# Altium PCB HomeController.PcbDoc (part 1 of 2)
Units mm, origin at the board's own origin, x right, y up, seen from the top; angles counter-clockwise.
Board outline 157.86 x 101.98 mm, 2 copper layers (Top Layer, Bottom Layer); 48 components, 58 nets, 214 pads, 16 vias.
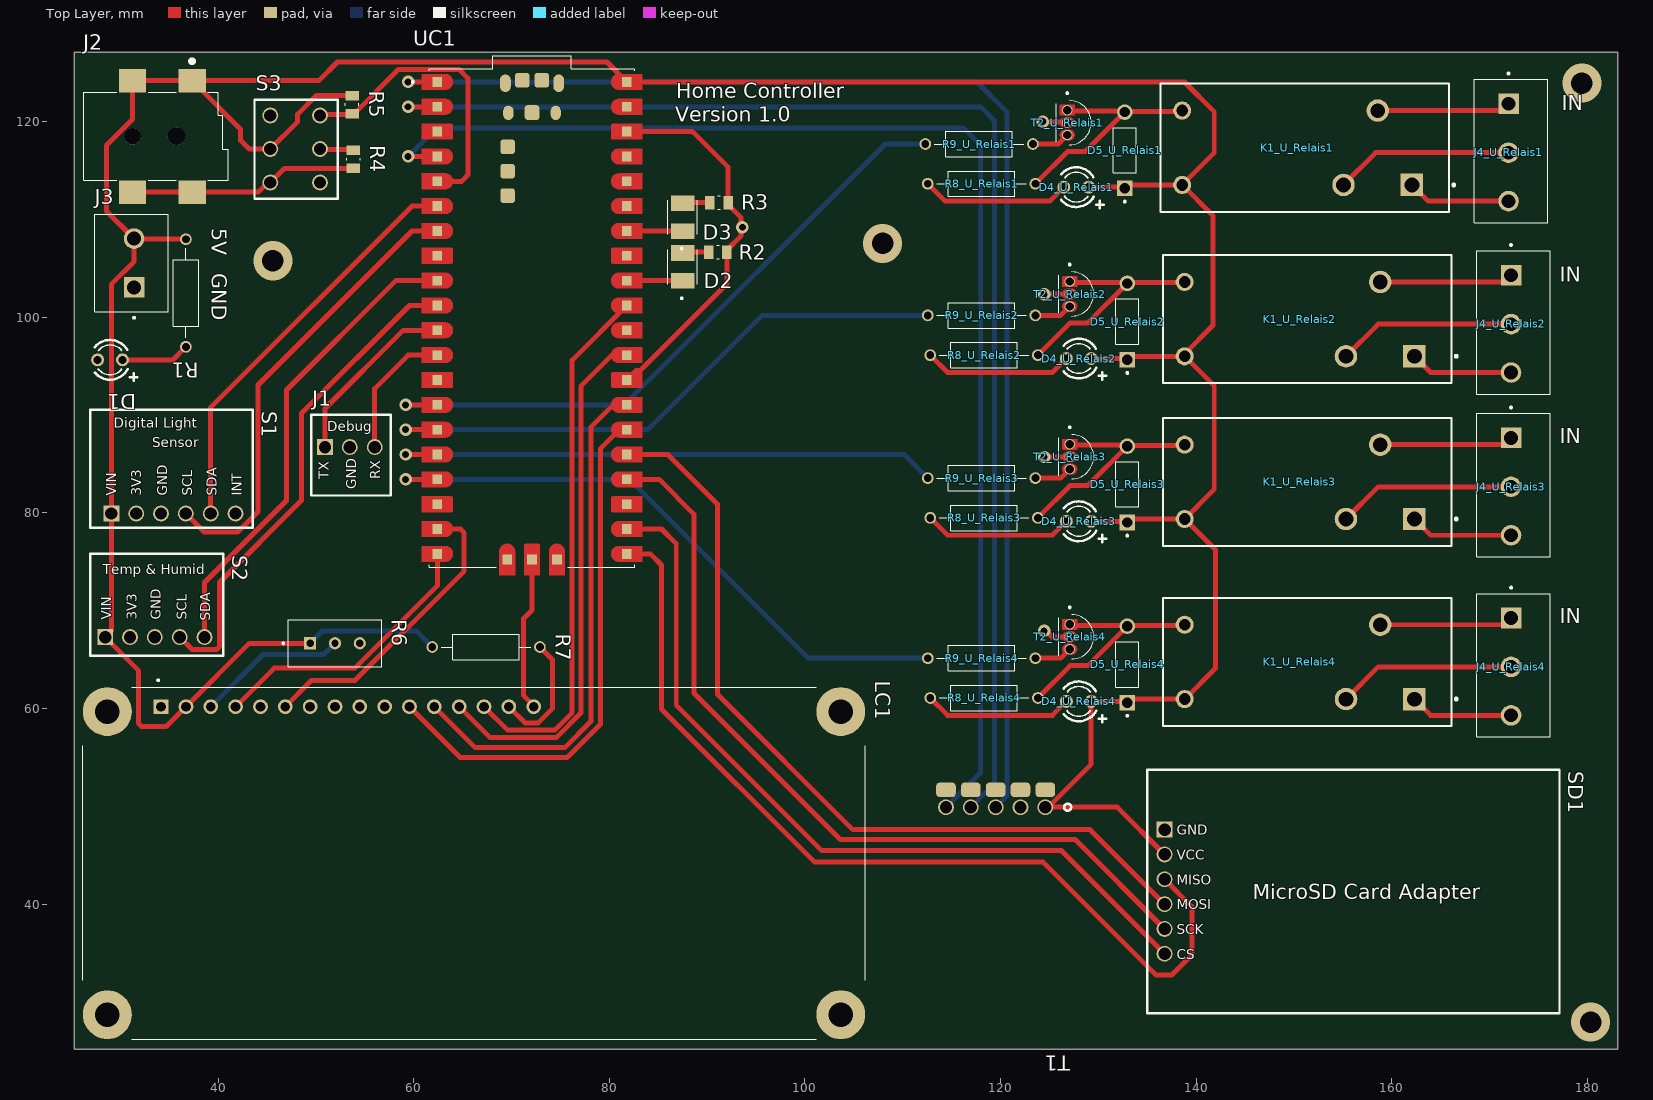
[diagram p0: Top Layer view]
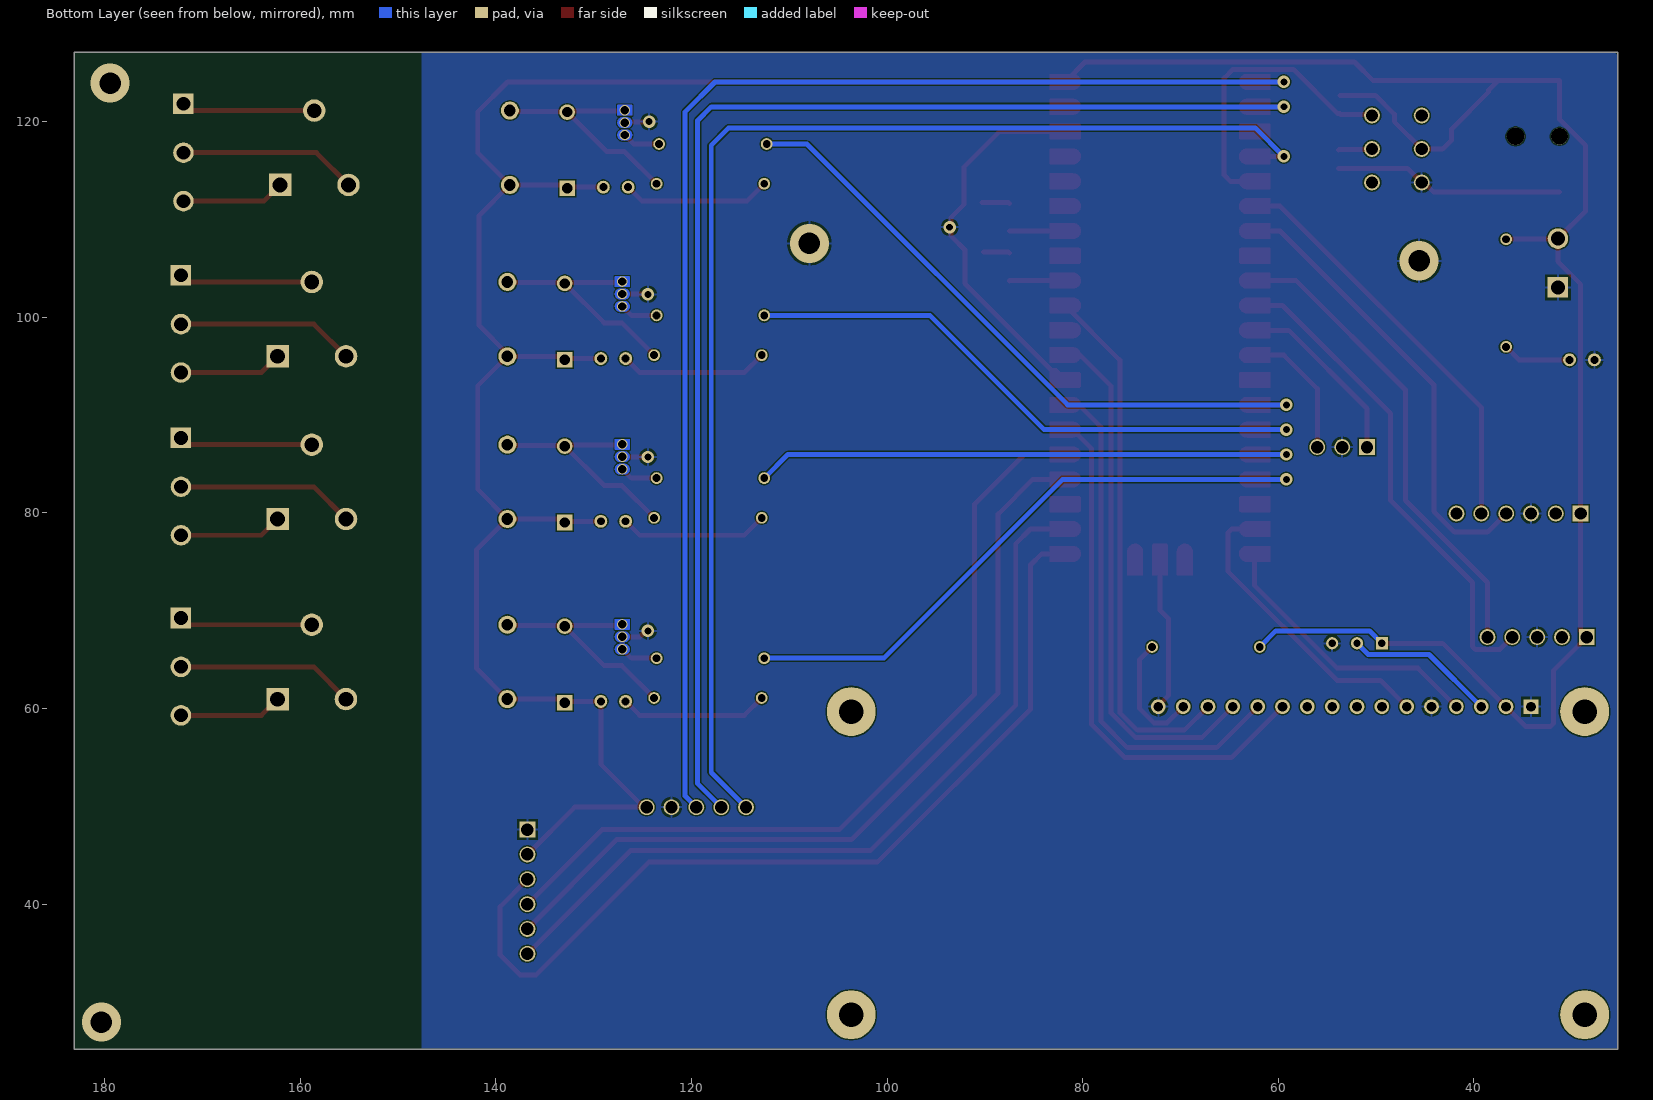
[diagram p1: Bottom Layer view, seen from below]
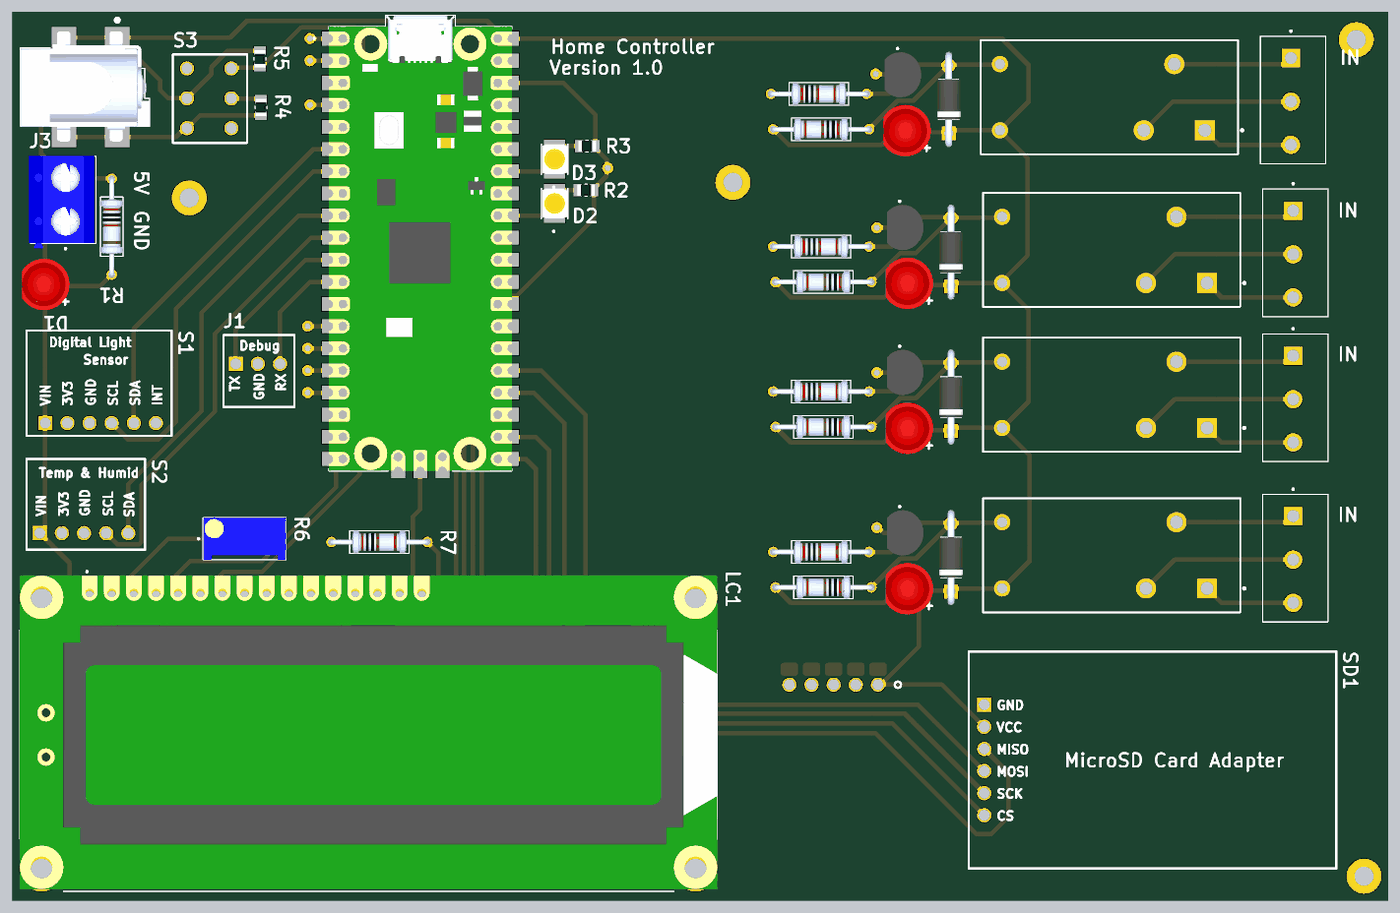
[diagram p3: 3D render of the assembled board from above, using the file's embedded part models]

## Layer stack, top to bottom
Top Solder: solder mask 0.0102, Solder Resist, Dk 3.5
Top Layer: signal copper 0.0356
Dielectric 1: dielectric 0.32, FR-4, Dk 4.8
Bottom Layer: signal copper 0.0356
Bottom Solder: solder mask 0.0102, Solder Resist, Dk 3.5

## Board outline
25.273,25.146 25.273,127.127 183.134,127.127 183.134,25.146

## Design rules (kind name [scope] priority, off if disabled: settings)
Clearance Clearance_1 [OnMid vs OnMid] p1: gap=0.127 ignorepadtopadclearanceinfootprint=FALSE sourcerule=37 cellrowname=All cellrowtype=0 cellcolname=All cellcoltype=0 innerlayers=TRUE
Clearance Clearance_2 [(ExistsOnLayer('Top Layer') Or ExistsOnLayer('Bottom Layer')) vs (ExistsOnLayer('Top Layer') Or ExistsOnLayer('Bottom Layer'))] p2: gap=0.127 ignorepadtopadclearanceinfootprint=FALSE sourcerule=37 cellrowname=All cellrowtype=0 cellcolname=All cellcoltype=0 outerlayers=TRUE
Clearance [All] p3: gap=0.254 ignorepadtopadclearanceinfootprint=FALSE ismatrix=TRUE
PolygonConnect [All] p1: connectstyle=Relief reliefconductorwidth=0.254 reliefentries=4 polygonreliefangle="90 Angle" airgapwidth=0.254
RoutingVias [All] p1: holewidth=0.711 width=1.27 viastyle="Through Hole" minholewidth=0.711 minwidth=1.27 maxholewidth=0.711 maxwidth=1.27
SolderMaskExpansion [All] p1: expansion=0.102 istentingtop=FALSE
Width MaxMinWidth_2 [All] p1: maxlimit=0.508 minlimit=0.127 preferedwidth=0.127 minimp=50.000000 maximp=50.000000 favimp=50.000000
Width MaxMinWidth_1 [All] p2: maxlimit=0.254 minlimit=0.254 preferedwidth=0.254
30 further rules are at their usual default settings.

## Classes and differential pairs
channel class Relais: U_Relais1 U_Relais2 U_Relais3 U_Relais4
component class U_Relais4: D4_U_Relais4 D5_U_Relais4 J4_U_Relais4 K1_U_Relais4 R8_U_Relais4 R9_U_Relais4 T2_U_Relais4
component class U_Relais3: D4_U_Relais3 D5_U_Relais3 J4_U_Relais3 K1_U_Relais3 R8_U_Relais3 R9_U_Relais3 T2_U_Relais3
component class U_Relais2: D4_U_Relais2 D5_U_Relais2 J4_U_Relais2 K1_U_Relais2 R8_U_Relais2 R9_U_Relais2 T2_U_Relais2
component class U_Relais1: D4_U_Relais1 D5_U_Relais1 J4_U_Relais1 K1_U_Relais1 R8_U_Relais1 R9_U_Relais1 T2_U_Relais1
component class "U_LCD Display": LC1 R6 R7
component class HomeController: D2 D3 J1 J2 J3 R2 R3 R4 R5 S1 S2 S3 SD1 T1
component class U_RpPicoW: D1 R1 UC1

## Components (designator, comment, footprint, x,y, rotation, side; value= is the part's Value field where it differs from the comment)
D1 "LED" "New footprint 1" 28.829,95.631 r180 top
D2 "SMD LED" "SMD LED-Footprint-1" 87.376,105.156 r90 top
D3 "SMD LED" "SMD LED-Footprint-1" 87.376,110.236 r90 top
D4_U_Relais1 "LED" "New footprint 1" 127.632,113.284 r180 top (schematic designator D4)
D4_U_Relais2 "LED" "New footprint 1" 127.886,95.758 r180 top (schematic designator D4)
D4_U_Relais3 "LED" "New footprint 1" 127.886,79.121 r180 top (schematic designator D4)
D4_U_Relais4 "LED" "New footprint 1" 127.889,60.706 r180 top (schematic designator D4)
D5_U_Relais1 "Diode" Diode-Footprint-1 132.585,116.967 r90 top (schematic designator D5)
D5_U_Relais2 "Diode" Diode-Footprint-1 132.839,99.441 r90 top (schematic designator D5)
D5_U_Relais3 "Diode" Diode-Footprint-1 132.839,82.804 r90 top (schematic designator D5)
D5_U_Relais4 "Diode" Diode-Footprint-1 132.842,64.389 r90 top (schematic designator D5)
J1 "Debug Probe" "Debug Probe-Footprint-1" 53.419,86.739 r0 top
J2 "Barrel Pulg SMD" "Barrel Pulg SMD-Footprint-1" 33.401,118.618 r0 top
J3 "Off Board Connector" "Off Board Connector-Footprint-1"#1 31.369,105.664 r90 top
J4_U_Relais1 "Off Board Connector" "Off Board Connector-Footprint-1"#2 171.955,116.8 r270 top (schematic designator J4)
J4_U_Relais2 "Off Board Connector" "Off Board Connector-Footprint-1"#2 172.209,99.274 r270 top (schematic designator J4)
J4_U_Relais3 "Off Board Connector" "Off Board Connector-Footprint-1"#2 172.209,82.637 r270 top (schematic designator J4)
J4_U_Relais4 "Off Board Connector" "Off Board Connector-Footprint-1"#2 172.212,64.222 r270 top (schematic designator J4)
K1_U_Relais1 "OMIH-SH-105L,394" FP-OMIH-SH-105L_394-MFG 151.127,117.348 r180 top (schematic designator K1)
K1_U_Relais2 "OMIH-SH-105L,394" FP-OMIH-SH-105L_394-MFG 151.381,99.822 r180 top (schematic designator K1)
K1_U_Relais3 "OMIH-SH-105L,394" FP-OMIH-SH-105L_394-MFG 151.381,83.185 r180 top (schematic designator K1)
K1_U_Relais4 "OMIH-SH-105L,394" FP-OMIH-SH-105L_394-MFG 151.384,64.77 r180 top (schematic designator K1)
LC1 "LCD Display" "LCD Display-Footprint-1" 65.024,40.386 r0 top
R1 "k1" Resistor 36.703,102.362 r270 top
R2 "1K" "SMD Resistor-Footprint-1" 91.065,106.701 r0 top
R3 "1K" "SMD Resistor-Footprint-1" 91.186,111.76 r0 top
R4 "1K" "SMD Resistor-Footprint-1" 53.848,116.205 r270 top
R5 "1K" "SMD Resistor-Footprint-1" 53.721,121.793 r270 top
R6 "Poti 3296" "Poti 3296-Footprint-1" 51.947,66.675 r0 top
R7 "Resistor" Resistor-Footprint-1 61.898,66.294 r0 top
R8_U_Relais1 "Resistor" Resistor-Footprint-1 123.568,113.665 r180 top (schematic designator R8)
R8_U_Relais2 "Resistor" Resistor-Footprint-1 123.822,96.139 r180 top (schematic designator R8)
R8_U_Relais3 "Resistor" Resistor-Footprint-1 123.822,79.502 r180 top (schematic designator R8)
R8_U_Relais4 "Resistor" Resistor-Footprint-1 123.825,61.087 r180 top (schematic designator R8)
R9_U_Relais1 "Resistor" Resistor-Footprint-1 112.314,117.729 r0 top (schematic designator R9)
R9_U_Relais2 "Resistor" Resistor-Footprint-1 112.568,100.203 r0 top (schematic designator R9)
R9_U_Relais3 "Resistor" Resistor-Footprint-1 112.568,83.566 r0 top (schematic designator R9)
R9_U_Relais4 "Resistor" Resistor-Footprint-1 112.571,65.151 r0 top (schematic designator R9)
S1 "TSL2591" TSL2591-Footprint-1 35.306,80.01 r0 top
S2 "Si7021" Si7021-Footprint-1 33.538,67.316 r0 top
S3 "Button Switch DIP" "Button Switch DIP -Footprint-1" 47.882,117.3 r0 top
SD1 "Micro SD Card Adapter" "Micro SD Card Adapter-Footprint-1" 136.779,41.275 r270 top
T1 "HC-12" HC-12-Footprint-1 119.507,49.911 r180 top
T2_U_Relais1 "Transistor" Transistor-Footprint-1 126.87,119.888 r270 top (schematic designator T2)
T2_U_Relais2 "Transistor" Transistor-Footprint-1 127.124,102.362 r270 top (schematic designator T2)
T2_U_Relais3 "Transistor" Transistor-Footprint-1 127.124,85.725 r270 top (schematic designator T2)
T2_U_Relais4 "Transistor" Transistor-Footprint-1 127.127,67.31 r270 top (schematic designator T2)
UC1 "PiPico" PiPico 72.098,90.17 r0 top

## Footprints (in the part's own frame and the unit in brackets; to place one, negate y for a bottom-side part, rotate by r counter-clockwise, add the part's x,y. Pads: shape width x height; smd on the part's side, far side on the other; paste and mask are expansions set on the pad)
"Barrel Pulg SMD-Footprint-1" [mm]
  rect 2.8x2.4 smd: 1A(3.937,5.588) 1B(-2.163,5.588) 2(-2.163,-5.812) 3(3.937,-5.812)
  round 1.7 hole 1.7 unplated: None_01(-2.163,-0.112)
  round 1.8 hole 1.8 unplated: None_02(2.337,-0.112)
  silkscreen extent -7.16,-4.61 7.64,7.78, body extent -7.2,-6.35 7.7,6.25, height 11
"Button Switch DIP -Footprint-1" [mm]
  round 1.62 hole 1.27: 1(-2.543,3.35) 2(2.537,3.35) 3(-2.543,-3.508) 4(2.537,-3.508) A(-2.543,-0.079) K(2.537,-0.079)
  silkscreen extent -4.16,-5.19 4.35,4.97, body extent -3.78,-4.81 3.96,4.59, height 6
"Debug Probe-Footprint-1" [mm]
  round 1.62 hole 1.27: GND(0.048,0.002) RX(2.588,0.002)
  rect 1.62x1.62 hole 1.27: TX(-2.492,0.002)
  silkscreen extent -3.89,-4.95 4.24,3.3
Diode-Footprint-1 [mm]
  round 1.59 hole 1.06: A(4.032,-0.127)
  rect 1.59x1.59 / inner round 1.59 / far side rect 1.59x1.59 hole 1.06: K(-3.778,-0.127)
  silkscreen extent -5.22,-1.31 2.44,1.05, body extent -5.35,-1.47 5.6,1.22, height 2.69
FP-OMIH-SH-105L_394-MFG [mm]
  rect 2.3x2.3 hole 1.5 paste-2539.97 mask+0: 1(-10.95,3.8)
  round 2.3 hole 1.5 paste-2539.97 mask+0: 2(-3.95,3.8) 4(-7.45,-3.8)
  round 1.85 hole 1.2 paste-2539.97 mask+0: 3(12.55,3.8) 5(12.55,-3.8)
  silkscreen extent -15.35,-6.55 14.75,6.55
HC-12-Footprint-1 [mm]
  round 1.62 hole 1.27: GND(-2.54,0) RXD(0,0) SET(5.08,0) TXD(2.54,0) VCC(-5.08,0)
  rrect50% 2x1.5 smd paste-1 mask+0: GND_(-2.54,-1.778) RXD_(0,-1.778) SET_(5.08,-1.778) TXD_(2.54,-1.778) VCC_(-5.08,-1.778)
  silkscreen extent -7.73,-0.36 -7.01,0.36, body extent -6.48,-2.79 6.86,24.51, height 5
"LCD Display-Footprint-1" [mm]
  rect 1.508x1.508 hole 1: 1(-30.857,19.81)
  round 1.508 hole 1: 2(-28.317,19.81) 3(-25.777,19.81) 4(-23.237,19.81) 5(-20.697,19.81) 6(-18.157,19.81) 7(-15.617,19.81) 8(-13.077,19.81) 9(-10.537,19.81) 10(-7.997,19.81) 11(-5.457,19.81) 12(-2.917,19.81) 13(-0.377,19.81) 14(2.163,19.81) 15(4.703,19.81) 16(7.243,19.81)
  round 5 hole 2.5: S1(-36.357,19.31) S2(38.643,19.31) S3(38.643,-11.69) S4(-36.357,-11.69)
  silkscreen extent -38.86,-14.19 41.14,22.61, body extent -38.86,-13.94 41.14,22.06, height 11
"Micro SD Card Adapter-Footprint-1" [mm]
  round 1.62 hole 1.27: CS(6.35,0) MISO(-1.27,0) MOSI(1.27,0) SCK(3.81,0) VCC(-3.81,0)
  rect 1.62x1.62 hole 1.27: GND(-6.35,0)
  silkscreen extent -12.45,-1.78 12.45,40.39, body extent -12.45,-1.91 12.45,40.39, height 3
"New footprint 1" [mil]
  round 52 hole 32: A(-54.62,-1.27) K(45.38,-1.27)
  silkscreen extent -115,-81 57,84, body extent -119,-125 95,107, height 378
"Off Board Connector-Footprint-1"#1 [mm]
  rect 2.1x2.1 hole 1.4: 1(-2.603,-0.031)
  round 2.1 hole 1.4: 2(2.397,-0.031)
  silkscreen extent -5.8,-3.53 4.9,3.97, body extent -5.66,-3.34 4.94,4.16, height 10
"Off Board Connector-Footprint-1"#2 [mm]
  rect 2.1x2.1 hole 1.4: 1(-5.04,0)
  round 2.1 hole 1.4: 2(-0.04,0) 3(4.913,0)
  silkscreen extent -8.24,-3.5 7.11,4
PiPico [mm]
  rect 1x1 smd paste-1 mask+0: 1(-9.69,33.909) 2(-9.69,31.369) 3(-9.69,28.829) 4(-9.69,26.289) 5(-9.69,23.749) 6(-9.69,21.209) 7(-9.69,18.669) 8(-9.69,16.129) 9(-9.69,13.589) 10(-9.69,11.049) 11(-9.69,8.509) 12(-9.69,5.969) 13(-9.69,3.429) 14(-9.69,0.889) 15(-9.69,-1.651) 16(-9.69,-4.191) 17(-9.69,-6.731) 18(-9.69,-9.271) 19(-9.69,-11.811) 20(-9.69,-14.351) 21(9.69,-14.351) 22(9.69,-11.811) 23(9.69,-9.271) 24(9.69,-6.731) 25(9.69,-4.191) 26(9.69,-1.651) 27(9.69,0.889) 28(9.69,3.429) 29(9.69,5.969) 30(9.69,8.509) 31(9.69,11.049) 32(9.69,13.589) 33(9.69,16.129) 34(9.69,18.669) 35(9.69,21.209) 36(9.69,23.749) 37(9.69,26.289) 38(9.69,28.829) 39(9.69,31.369) 40(9.69,33.909) D1(-2.54,-14.921) D2(0,-14.921) D3(2.54,-14.921)
  oval 1.1x1.8 smd: A(-2.725,33.779) B(2.725,33.779)
  oval 1.05x1.45 smd: C(-2.425,30.749) D(2.425,30.749)
  rrect40% 1.5x1.5 smd: TP1(0,30.779) TP2(1,34.079) TP3(-1,34.079) TP4(-2.5,27.279) TP5(-2.5,24.779) TP6(-2.5,22.279)
  Top Layer region: -8.848,14.388 -8.806,14.385 -8.765,14.379 -8.724,14.372 -8.683,14.362 -8.643,14.35 -8.603,14.336 -8.565,14.32 -8.527,14.302 -8.49,14.282 -8.454,14.26 -8.42,14.236 -8.387,14.211 -8.355,14.184 -8.324,14.155 -8.295,14.124 -8.268,14.092 -8.243,14.059 -8.219,14.025 -8.197,13.989 -8.177,13.952 -8.159,13.914 -8.143,13.876 -8.129,13.836 -8.117,13.796 -8.107,13.755 -8.1,13.714 -8.094,13.673 -8.091,13.631 -8.09,13.589 -8.091,13.547 -8.094,13.505 -8.1,13.464 -8.107,13.423 -8.117,13.382 -8.129,13.342 -8.143,13.302 -8.159,13.264 -8.177,13.226 -8.197,13.189 -8.219,13.153 -8.243,13.119 -8.268,13.086 -8.295,13.054 -8.324,13.023 -8.355,12.994 -8.387,12.967 -8.42,12.942 -8.454,12.918 -8.49,12.896 -8.527,12.876 -8.565,12.858 -8.603,12.842 -8.643,12.828 -8.683,12.816 -8.724,12.806 -8.765,12.799 -8.806,12.793 -8.848,12.79 -8.89,12.789 -11.29,12.789 -11.29,14.389 -8.89,14.389
  Top Layer region: -8.848,11.848 -8.806,11.845 -8.765,11.839 -8.724,11.832 -8.683,11.822 -8.643,11.81 -8.603,11.796 -8.565,11.78 -8.527,11.762 -8.49,11.742 -8.454,11.72 -8.42,11.696 -8.387,11.671 -8.355,11.644 -8.324,11.615 -8.295,11.584 -8.268,11.552 -8.243,11.519 -8.219,11.485 -8.197,11.449 -8.177,11.412 -8.159,11.374 -8.143,11.336 -8.129,11.296 -8.117,11.256 -8.107,11.215 -8.1,11.174 -8.094,11.133 -8.091,11.091 -8.09,11.049 -8.091,11.007 -8.094,10.965 -8.1,10.924 -8.107,10.883 -8.117,10.842 -8.129,10.802 -8.143,10.762 -8.159,10.724 -8.177,10.686 -8.197,10.649 -8.219,10.613 -8.243,10.579 -8.268,10.546 -8.295,10.514 -8.324,10.483 -8.355,10.454 -8.387,10.427 -8.42,10.402 -8.454,10.378 -8.49,10.356 -8.527,10.336 -8.565,10.318 -8.603,10.302 -8.643,10.288 -8.683,10.276 -8.724,10.266 -8.765,10.259 -8.806,10.253 -8.848,10.25 -8.89,10.249 -11.29,10.249 -11.29,11.849 -8.89,11.849
  Top Layer region: -8.848,9.308 -8.806,9.305 -8.765,9.299 -8.724,9.292 -8.683,9.282 -8.643,9.27 -8.603,9.256 -8.565,9.24 -8.527,9.222 -8.49,9.202 -8.454,9.18 -8.42,9.156 -8.387,9.131 -8.355,9.104 -8.324,9.075 -8.295,9.044 -8.268,9.012 -8.243,8.979 -8.219,8.945 -8.197,8.909 -8.177,8.872 -8.159,8.834 -8.143,8.796 -8.129,8.756 -8.117,8.716 -8.107,8.675 -8.1,8.634 -8.094,8.593 -8.091,8.551 -8.09,8.509 -8.091,8.467 -8.094,8.425 -8.1,8.384 -8.107,8.343 -8.117,8.302 -8.129,8.262 -8.143,8.222 -8.159,8.184 -8.177,8.146 -8.197,8.109 -8.219,8.073 -8.243,8.039 -8.268,8.006 -8.295,7.974 -8.324,7.943 -8.355,7.914 -8.387,7.887 -8.42,7.862 -8.454,7.838 -8.49,7.816 -8.527,7.796 -8.565,7.778 -8.603,7.762 -8.643,7.748 -8.683,7.736 -8.724,7.726 -8.765,7.719 -8.806,7.713 -8.848,7.71 -8.89,7.709 -11.29,7.709 -11.29,9.309 -8.89,9.309
  Top Layer region: -8.848,6.768 -8.806,6.765 -8.765,6.759 -8.724,6.752 -8.683,6.742 -8.643,6.73 -8.603,6.716 -8.565,6.7 -8.527,6.682 -8.49,6.662 -8.454,6.64 -8.42,6.616 -8.387,6.591 -8.355,6.564 -8.324,6.535 -8.295,6.504 -8.268,6.472 -8.243,6.439 -8.219,6.405 -8.197,6.369 -8.177,6.332 -8.159,6.294 -8.143,6.256 -8.129,6.216 -8.117,6.176 -8.107,6.135 -8.1,6.094 -8.094,6.053 -8.091,6.011 -8.09,5.969 -8.091,5.927 -8.094,5.885 -8.1,5.844 -8.107,5.803 -8.117,5.762 -8.129,5.722 -8.143,5.682 -8.159,5.644 -8.177,5.606 -8.197,5.569 -8.219,5.533 -8.243,5.499 -8.268,5.466 -8.295,5.434 -8.324,5.403 -8.355,5.374 -8.387,5.347 -8.42,5.322 -8.454,5.298 -8.49,5.276 -8.527,5.256 -8.565,5.238 -8.603,5.222 -8.643,5.208 -8.683,5.196 -8.724,5.186 -8.765,5.179 -8.806,5.173 -8.848,5.17 -8.89,5.169 -11.29,5.169 -11.29,6.769 -8.89,6.769
  Top Layer region: -8.848,1.688 -8.806,1.685 -8.765,1.679 -8.724,1.672 -8.683,1.662 -8.643,1.65 -8.603,1.636 -8.565,1.62 -8.527,1.602 -8.49,1.582 -8.454,1.56 -8.42,1.536 -8.387,1.511 -8.355,1.484 -8.324,1.455 -8.295,1.424 -8.268,1.392 -8.243,1.359 -8.219,1.325 -8.197,1.289 -8.177,1.252 -8.159,1.214 -8.143,1.176 -8.129,1.136 -8.117,1.096 -8.107,1.055 -8.1,1.014 -8.094,0.973 -8.091,0.931 -8.09,0.889 -8.091,0.847 -8.094,0.805 -8.1,0.764 -8.107,0.723 -8.117,0.682 -8.129,0.642 -8.143,0.602 -8.159,0.564 -8.177,0.526 -8.197,0.489 -8.219,0.453 -8.243,0.419 -8.268,0.386 -8.295,0.354 -8.324,0.323 -8.355,0.294 -8.387,0.267 -8.42,0.242 -8.454,0.218 -8.49,0.196 -8.527,0.176 -8.565,0.158 -8.603,0.142 -8.643,0.128 -8.683,0.116 -8.724,0.106 -8.765,0.099 -8.806,0.093 -8.848,0.09 -8.89,0.089 -11.29,0.089 -11.29,1.689 -8.89,1.689
  Top Layer region: -8.848,-0.852 -8.806,-0.855 -8.765,-0.861 -8.724,-0.868 -8.683,-0.878 -8.643,-0.89 -8.603,-0.904 -8.565,-0.92 -8.527,-0.938 -8.49,-0.958 -8.454,-0.98 -8.42,-1.004 -8.387,-1.029 -8.355,-1.056 -8.324,-1.085 -8.295,-1.116 -8.268,-1.148 -8.243,-1.181 -8.219,-1.215 -8.197,-1.251 -8.177,-1.288 -8.159,-1.326 -8.143,-1.364 -8.129,-1.404 -8.117,-1.444 -8.107,-1.485 -8.1,-1.526 -8.094,-1.567 -8.091,-1.609 -8.09,-1.651 -8.091,-1.693 -8.094,-1.735 -8.1,-1.776 -8.107,-1.817 -8.117,-1.858 -8.129,-1.898 -8.143,-1.938 -8.159,-1.976 -8.177,-2.014 -8.197,-2.051 -8.219,-2.087 -8.243,-2.121 -8.268,-2.154 -8.295,-2.186 -8.324,-2.217 -8.355,-2.246 -8.387,-2.273 -8.42,-2.298 -8.454,-2.322 -8.49,-2.344 -8.527,-2.364 -8.565,-2.382 -8.603,-2.398 -8.643,-2.412 -8.683,-2.424 -8.724,-2.434 -8.765,-2.441 -8.806,-2.447 -8.848,-2.45 -8.89,-2.451 -11.29,-2.451 -11.29,-0.851 -8.89,-0.851
  Top Layer region: -8.848,-3.392 -8.806,-3.395 -8.765,-3.401 -8.724,-3.408 -8.683,-3.418 -8.643,-3.43 -8.603,-3.444 -8.565,-3.46 -8.527,-3.478 -8.49,-3.498 -8.454,-3.52 -8.42,-3.544 -8.387,-3.569 -8.355,-3.596 -8.324,-3.625 -8.295,-3.656 -8.268,-3.688 -8.243,-3.721 -8.219,-3.755 -8.197,-3.791 -8.177,-3.828 -8.159,-3.866 -8.143,-3.904 -8.129,-3.944 -8.117,-3.984 -8.107,-4.025 -8.1,-4.066 -8.094,-4.107 -8.091,-4.149 -8.09,-4.191 -8.091,-4.233 -8.094,-4.275 -8.1,-4.316 -8.107,-4.357 -8.117,-4.398 -8.129,-4.438 -8.143,-4.478 -8.159,-4.516 -8.177,-4.554 -8.197,-4.591 -8.219,-4.627 -8.243,-4.661 -8.268,-4.694 -8.295,-4.726 -8.324,-4.757 -8.355,-4.786 -8.387,-4.813 -8.42,-4.838 -8.454,-4.862 -8.49,-4.884 -8.527,-4.904 -8.565,-4.922 -8.603,-4.938 -8.643,-4.952 -8.683,-4.964 -8.724,-4.974 -8.765,-4.981 -8.806,-4.987 -8.848,-4.99 -8.89,-4.991 -11.29,-4.991 -11.29,-3.391 -8.89,-3.391
  Top Layer region: -8.848,-5.932 -8.806,-5.935 -8.765,-5.941 -8.724,-5.948 -8.683,-5.958 -8.643,-5.97 -8.603,-5.984 -8.565,-6 -8.527,-6.018 -8.49,-6.038 -8.454,-6.06 -8.42,-6.084 -8.387,-6.109 -8.355,-6.136 -8.324,-6.165 -8.295,-6.196 -8.268,-6.228 -8.243,-6.261 -8.219,-6.295 -8.197,-6.331 -8.177,-6.368 -8.159,-6.406 -8.143,-6.444 -8.129,-6.484 -8.117,-6.524 -8.107,-6.565 -8.1,-6.606 -8.094,-6.647 -8.091,-6.689 -8.09,-6.731 -8.091,-6.773 -8.094,-6.815 -8.1,-6.856 -8.107,-6.897 -8.117,-6.938 -8.129,-6.978 -8.143,-7.018 -8.159,-7.056 -8.177,-7.094 -8.197,-7.131 -8.219,-7.167 -8.243,-7.201 -8.268,-7.234 -8.295,-7.266 -8.324,-7.297 -8.355,-7.326 -8.387,-7.353 -8.42,-7.378 -8.454,-7.402 -8.49,-7.424 -8.527,-7.444 -8.565,-7.462 -8.603,-7.478 -8.643,-7.492 -8.683,-7.504 -8.724,-7.514 -8.765,-7.521 -8.806,-7.527 -8.848,-7.53 -8.89,-7.531 -11.29,-7.531 -11.29,-5.931 -8.89,-5.931
  Top Layer region: -8.848,-11.012 -8.806,-11.015 -8.765,-11.021 -8.724,-11.028 -8.683,-11.038 -8.643,-11.05 -8.603,-11.064 -8.565,-11.08 -8.527,-11.098 -8.49,-11.118 -8.454,-11.14 -8.42,-11.164 -8.387,-11.189 -8.355,-11.216 -8.324,-11.245 -8.295,-11.276 -8.268,-11.308 -8.243,-11.341 -8.219,-11.375 -8.197,-11.411 -8.177,-11.448 -8.159,-11.486 -8.143,-11.524 -8.129,-11.564 -8.117,-11.604 -8.107,-11.645 -8.1,-11.686 -8.094,-11.727 -8.091,-11.769 -8.09,-11.811 -8.091,-11.853 -8.094,-11.895 -8.1,-11.936 -8.107,-11.977 -8.117,-12.018 -8.129,-12.058 -8.143,-12.098 -8.159,-12.136 -8.177,-12.174 -8.197,-12.211 -8.219,-12.247 -8.243,-12.281 -8.268,-12.314 -8.295,-12.346 -8.324,-12.377 -8.355,-12.406 -8.387,-12.433 -8.42,-12.458 -8.454,-12.482 -8.49,-12.504 -8.527,-12.524 -8.565,-12.542 -8.603,-12.558 -8.643,-12.572 -8.683,-12.584 -8.724,-12.594 -8.765,-12.601 -8.806,-12.607 -8.848,-12.61 -8.89,-12.611 -11.29,-12.611 -11.29,-11.011 -8.89,-11.011
  Top Layer region: -8.848,-13.552 -8.806,-13.555 -8.765,-13.561 -8.724,-13.568 -8.683,-13.578 -8.643,-13.59 -8.603,-13.604 -8.565,-13.62 -8.527,-13.638 -8.49,-13.658 -8.454,-13.68 -8.42,-13.704 -8.387,-13.729 -8.355,-13.756 -8.324,-13.785 -8.295,-13.816 -8.268,-13.848 -8.243,-13.881 -8.219,-13.915 -8.197,-13.951 -8.177,-13.988 -8.159,-14.026 -8.143,-14.064 -8.129,-14.104 -8.117,-14.144 -8.107,-14.185 -8.1,-14.226 -8.094,-14.267 -8.091,-14.309 -8.09,-14.351 -8.091,-14.393 -8.094,-14.435 -8.1,-14.476 -8.107,-14.517 -8.117,-14.558 -8.129,-14.598 -8.143,-14.638 -8.159,-14.676 -8.177,-14.714 -8.197,-14.751 -8.219,-14.787 -8.243,-14.821 -8.268,-14.854 -8.295,-14.886 -8.324,-14.917 -8.355,-14.946 -8.387,-14.973 -8.42,-14.998 -8.454,-15.022 -8.49,-15.044 -8.527,-15.064 -8.565,-15.082 -8.603,-15.098 -8.643,-15.112 -8.683,-15.124 -8.724,-15.134 -8.765,-15.141 -8.806,-15.147 -8.848,-15.15 -8.89,-15.151 -11.29,-15.151 -11.29,-13.551 -8.89,-13.551
  Top Layer region: -8.269,29.628 -8.259,29.627 -8.248,29.625 -8.238,29.622 -8.228,29.619 -8.218,29.616 -8.209,29.612 -8.199,29.607 -8.19,29.602 -8.181,29.597 -8.172,29.591 -8.164,29.584 -8.156,29.578 -8.149,29.57 -8.141,29.563 -8.135,29.555 -8.128,29.547 -8.122,29.538 -8.117,29.529 -8.112,29.52 -8.107,29.51 -8.103,29.501 -8.1,29.491 -8.097,29.481 -8.094,29.471 -8.092,29.46 -8.091,29.45 -8.09,29.439 -8.09,29.429 -8.09,28.229 -8.09,28.219 -8.091,28.208 -8.092,28.198 -8.094,28.187 -8.097,28.177 -8.1,28.167 -8.103,28.157 -8.107,28.148 -8.112,28.138 -8.117,28.129 -8.122,28.12 -8.128,28.111 -8.135,28.103 -8.141,28.095 -8.149,28.088 -8.156,28.08 -8.164,28.074 -8.172,28.067 -8.181,28.061 -8.19,28.056 -8.199,28.051 -8.209,28.046 -8.218,28.042 -8.228,28.039 -8.238,28.036 -8.248,28.033 -8.259,28.031 -8.269,28.03 -8.28,28.029 -11.29,28.029 -11.29,29.629 -8.28,29.629
  Top Layer region: -8.269,16.928 -8.259,16.927 -8.248,16.925 -8.238,16.922 -8.228,16.919 -8.218,16.916 -8.209,16.912 -8.199,16.907 -8.19,16.902 -8.181,16.897 -8.172,16.891 -8.164,16.884 -8.156,16.878 -8.149,16.87 -8.141,16.863 -8.135,16.855 -8.128,16.847 -8.122,16.838 -8.117,16.829 -8.112,16.82 -8.107,16.81 -8.103,16.801 -8.1,16.791 -8.097,16.781 -8.094,16.771 -8.092,16.76 -8.091,16.75 -8.09,16.739 -8.09,16.729 -8.09,15.529 -8.09,15.519 -8.091,15.508 -8.092,15.498 -8.094,15.487 -8.097,15.477 -8.1,15.467 -8.103,15.457 -8.107,15.448 -8.112,15.438 -8.117,15.429 -8.122,15.42 -8.128,15.411 -8.135,15.403 -8.141,15.395 -8.149,15.388 -8.156,15.38 -8.164,15.374 -8.172,15.367 -8.181,15.361 -8.19,15.356 -8.199,15.351 -8.209,15.346 -8.218,15.342 -8.228,15.339 -8.238,15.336 -8.248,15.333 -8.259,15.331 -8.269,15.33 -8.28,15.329 -11.29,15.329 -11.29,16.929 -8.28,16.929
  Top Layer region: -8.269,4.228 -8.259,4.227 -8.248,4.225 -8.238,4.222 -8.228,4.219 -8.218,4.216 -8.209,4.212 -8.199,4.207 -8.19,4.202 -8.181,4.197 -8.172,4.191 -8.164,4.184 -8.156,4.178 -8.149,4.17 -8.141,4.163 -8.135,4.155 -8.128,4.147 -8.122,4.138 -8.117,4.129 -8.112,4.12 -8.107,4.11 -8.103,4.101 -8.1,4.091 -8.097,4.081 -8.094,4.071 -8.092,4.06 -8.091,4.05 -8.09,4.039 -8.09,4.029 -8.09,2.829 -8.09,2.819 -8.091,2.808 -8.092,2.798 -8.094,2.787 -8.097,2.777 -8.1,2.767 -8.103,2.757 -8.107,2.748 -8.112,2.738 -8.117,2.729 -8.122,2.72 -8.128,2.711 -8.135,2.703 -8.141,2.695 -8.149,2.688 -8.156,2.68 -8.164,2.674 -8.172,2.667 -8.181,2.661 -8.19,2.656 -8.199,2.651 -8.209,2.646 -8.218,2.642 -8.228,2.639 -8.238,2.636 -8.248,2.633 -8.259,2.631 -8.269,2.63 -8.28,2.629 -11.29,2.629 -11.29,4.229 -8.28,4.229
  Top Layer region: -8.269,-8.472 -8.259,-8.473 -8.248,-8.475 -8.238,-8.478 -8.228,-8.481 -8.218,-8.484 -8.209,-8.488 -8.199,-8.493 -8.19,-8.498 -8.181,-8.503 -8.172,-8.509 -8.164,-8.516 -8.156,-8.522 -8.149,-8.53 -8.141,-8.537 -8.135,-8.545 -8.128,-8.553 -8.122,-8.562 -8.117,-8.571 -8.112,-8.58 -8.107,-8.59 -8.103,-8.599 -8.1,-8.609 -8.097,-8.619 -8.094,-8.629 -8.092,-8.64 -8.091,-8.65 -8.09,-8.661 -8.09,-8.671 -8.09,-9.871 -8.09,-9.881 -8.091,-9.892 -8.092,-9.902 -8.094,-9.913 -8.097,-9.923 -8.1,-9.933 -8.103,-9.943 -8.107,-9.952 -8.112,-9.962 -8.117,-9.971 -8.122,-9.98 -8.128,-9.989 -8.135,-9.997 -8.141,-10.005 -8.149,-10.012 -8.156,-10.02 -8.164,-10.026 -8.172,-10.033 -8.181,-10.039 -8.19,-10.044 -8.199,-10.049 -8.209,-10.054 -8.218,-10.058 -8.228,-10.061 -8.238,-10.064 -8.248,-10.067 -8.259,-10.069 -8.269,-10.07 -8.28,-10.071 -11.29,-10.071 -11.29,-8.471 -8.28,-8.471
  Top Layer region: -8.848,32.168 -8.806,32.165 -8.765,32.159 -8.724,32.152 -8.683,32.142 -8.643,32.13 -8.603,32.116 -8.565,32.1 -8.527,32.082 -8.49,32.062 -8.454,32.04 -8.42,32.016 -8.387,31.991 -8.355,31.964 -8.324,31.935 -8.295,31.904 -8.268,31.872 -8.243,31.839 -8.219,31.805 -8.197,31.769 -8.177,31.732 -8.159,31.694 -8.143,31.656 -8.129,31.616 -8.117,31.576 -8.107,31.535 -8.1,31.494 -8.094,31.453 -8.091,31.411 -8.09,31.369 -8.091,31.327 -8.094,31.285 -8.1,31.244 -8.107,31.203 -8.117,31.162 -8.129,31.122 -8.143,31.082 -8.159,31.044 -8.177,31.006 -8.197,30.969 -8.219,30.933 -8.243,30.899 -8.268,30.866 -8.295,30.834 -8.324,30.803 -8.355,30.774 -8.387,30.747 -8.42,30.722 -8.454,30.698 -8.49,30.676 -8.527,30.656 -8.565,30.638 -8.603,30.622 -8.643,30.608 -8.683,30.596 -8.724,30.586 -8.765,30.579 -8.806,30.573 -8.848,30.57 -8.89,30.569 -11.29,30.569 -11.29,32.169 -8.89,32.169
  Top Layer region: -8.848,27.088 -8.806,27.085 -8.765,27.079 -8.724,27.072 -8.683,27.062 -8.643,27.05 -8.603,27.036 -8.565,27.02 -8.527,27.002 -8.49,26.982 -8.454,26.96 -8.42,26.936 -8.387,26.911 -8.355,26.884 -8.324,26.855 -8.295,26.824 -8.268,26.792 -8.243,26.759 -8.219,26.725 -8.197,26.689 -8.177,26.652 -8.159,26.614 -8.143,26.576 -8.129,26.536 -8.117,26.496 -8.107,26.455 -8.1,26.414 -8.094,26.373 -8.091,26.331 -8.09,26.289 -8.091,26.247 -8.094,26.205 -8.1,26.164 -8.107,26.123 -8.117,26.082 -8.129,26.042 -8.143,26.002 -8.159,25.964 -8.177,25.926 -8.197,25.889 -8.219,25.853 -8.243,25.819 -8.268,25.786 -8.295,25.754 -8.324,25.723 -8.355,25.694 -8.387,25.667 -8.42,25.642 -8.454,25.618 -8.49,25.596 -8.527,25.576 -8.565,25.558 -8.603,25.542 -8.643,25.528 -8.683,25.516 -8.724,25.506 -8.765,25.499 -8.806,25.493 -8.848,25.49 -8.89,25.489 -11.29,25.489 -11.29,27.089 -8.89,27.089
  Top Layer region: -8.848,24.548 -8.806,24.545 -8.765,24.539 -8.724,24.532 -8.683,24.522 -8.643,24.51 -8.603,24.496 -8.565,24.48 -8.527,24.462 -8.49,24.442 -8.454,24.42 -8.42,24.396 -8.387,24.371 -8.355,24.344 -8.324,24.315 -8.295,24.284 -8.268,24.252 -8.243,24.219 -8.219,24.185 -8.197,24.149 -8.177,24.112 -8.159,24.074 -8.143,24.036 -8.129,23.996 -8.117,23.956 -8.107,23.915 -8.1,23.874 -8.094,23.833 -8.091,23.791 -8.09,23.749 -8.091,23.707 -8.094,23.665 -8.1,23.624 -8.107,23.583 -8.117,23.542 -8.129,23.502 -8.143,23.462 -8.159,23.424 -8.177,23.386 -8.197,23.349 -8.219,23.313 -8.243,23.279 -8.268,23.246 -8.295,23.214 -8.324,23.183 -8.355,23.154 -8.387,23.127 -8.42,23.102 -8.454,23.078 -8.49,23.056 -8.527,23.036 -8.565,23.018 -8.603,23.002 -8.643,22.988 -8.683,22.976 -8.724,22.966 -8.765,22.959 -8.806,22.953 -8.848,22.95 -8.89,22.949 -11.29,22.949 -11.29,24.549 -8.89,24.549
  Top Layer region: -8.848,22.008 -8.806,22.005 -8.765,21.999 -8.724,21.992 -8.683,21.982 -8.643,21.97 -8.603,21.956 -8.565,21.94 -8.527,21.922 -8.49,21.902 -8.454,21.88 -8.42,21.856 -8.387,21.831 -8.355,21.804 -8.324,21.775 -8.295,21.744 -8.268,21.712 -8.243,21.679 -8.219,21.645 -8.197,21.609 -8.177,21.572 -8.159,21.534 -8.143,21.496 -8.129,21.456 -8.117,21.416 -8.107,21.375 -8.1,21.334 -8.094,21.293 -8.091,21.251 -8.09,21.209 -8.091,21.167 -8.094,21.125 -8.1,21.084 -8.107,21.043 -8.117,21.002 -8.129,20.962 -8.143,20.922 -8.159,20.884 -8.177,20.846 -8.197,20.809 -8.219,20.773 -8.243,20.739 -8.268,20.706 -8.295,20.674 -8.324,20.643 -8.355,20.614 -8.387,20.587 -8.42,20.562 -8.454,20.538 -8.49,20.516 -8.527,20.496 -8.565,20.478 -8.603,20.462 -8.643,20.448 -8.683,20.436 -8.724,20.426 -8.765,20.419 -8.806,20.413 -8.848,20.41 -8.89,20.409 -11.29,20.409 -11.29,22.009 -8.89,22.009
  Top Layer region: -8.848,19.468 -8.806,19.465 -8.765,19.459 -8.724,19.452 -8.683,19.442 -8.643,19.43 -8.603,19.416 -8.565,19.4 -8.527,19.382 -8.49,19.362 -8.454,19.34 -8.42,19.316 -8.387,19.291 -8.355,19.264 -8.324,19.235 -8.295,19.204 -8.268,19.172 -8.243,19.139 -8.219,19.105 -8.197,19.069 -8.177,19.032 -8.159,18.994 -8.143,18.956 -8.129,18.916 -8.117,18.876 -8.107,18.835 -8.1,18.794 -8.094,18.753 -8.091,18.711 -8.09,18.669 -8.091,18.627 -8.094,18.585 -8.1,18.544 -8.107,18.503 -8.117,18.462 -8.129,18.422 -8.143,18.382 -8.159,18.344 -8.177,18.306 -8.197,18.269 -8.219,18.233 -8.243,18.199 -8.268,18.166 -8.295,18.134 -8.324,18.103 -8.355,18.074 -8.387,18.047 -8.42,18.022 -8.454,17.998 -8.49,17.976 -8.527,17.956 -8.565,17.938 -8.603,17.922 -8.643,17.908 -8.683,17.896 -8.724,17.886 -8.765,17.879 -8.806,17.873 -8.848,17.87 -8.89,17.869 -11.29,17.869 -11.29,19.469 -8.89,19.469
  Top Layer region: 11.29,28.029 8.28,28.029 8.269,28.03 8.259,28.031 8.248,28.033 8.238,28.036 8.228,28.039 8.218,28.042 8.209,28.046 8.199,28.051 8.19,28.056 8.181,28.061 8.172,28.067 8.164,28.074 8.156,28.08 8.149,28.088 8.141,28.095 8.135,28.103 8.128,28.111 8.122,28.12 8.117,28.129 8.112,28.138 8.107,28.148 8.103,28.157 8.1,28.167 8.097,28.177 8.094,28.187 8.092,28.198 8.091,28.208 8.09,28.219 8.09,28.229 8.09,29.429 8.09,29.439 8.091,29.45 8.092,29.46 8.094,29.471 8.097,29.481 8.1,29.491 8.103,29.501 8.107,29.51 8.112,29.52 8.117,29.529 8.122,29.538 8.128,29.547 8.135,29.555 8.141,29.563 8.149,29.57 8.156,29.578 8.164,29.584 8.172,29.591 8.181,29.597 8.19,29.602 8.199,29.607 8.209,29.612 8.218,29.616 8.228,29.619 8.238,29.622 8.248,29.625 8.259,29.627 8.269,29.628 8.28,29.629 11.29,29.629
  Top Layer region: 11.29,30.569 8.89,30.569 8.848,30.57 8.806,30.573 8.765,30.579 8.724,30.586 8.683,30.596 8.643,30.608 8.603,30.622 8.565,30.638 8.527,30.656 8.49,30.676 8.454,30.698 8.42,30.722 8.387,30.747 8.355,30.774 8.324,30.803 8.295,30.834 8.268,30.866 8.243,30.899 8.219,30.933 8.197,30.969 8.177,31.006 8.159,31.044 8.143,31.082 8.129,31.122 8.117,31.162 8.107,31.203 8.1,31.244 8.094,31.285 8.091,31.327 8.09,31.369 8.091,31.411 8.094,31.453 8.1,31.494 8.107,31.535 8.117,31.576 8.129,31.616 8.143,31.656 8.159,31.694 8.177,31.732 8.197,31.769 8.219,31.805 8.243,31.839 8.268,31.872 8.295,31.904 8.324,31.935 8.355,31.964 8.387,31.991 8.42,32.016 8.454,32.04 8.49,32.062 8.527,32.082 8.565,32.1 8.603,32.116 8.643,32.13 8.683,32.142 8.724,32.152 8.765,32.159 8.806,32.165 8.848,32.168 8.89,32.169 11.29,32.169
  Top Layer region: 11.29,20.409 8.89,20.409 8.848,20.41 8.806,20.413 8.765,20.419 8.724,20.426 8.683,20.436 8.643,20.448 8.603,20.462 8.565,20.478 8.527,20.496 8.49,20.516 8.454,20.538 8.42,20.562 8.387,20.587 8.355,20.614 8.324,20.643 8.295,20.674 8.268,20.706 8.243,20.739 8.219,20.773 8.197,20.809 8.177,20.846 8.159,20.884 8.143,20.922 8.129,20.962 8.117,21.002 8.107,21.043 8.1,21.084 8.094,21.125 8.091,21.167 8.09,21.209 8.091,21.251 8.094,21.293 8.1,21.334 8.107,21.375 8.117,21.416 8.129,21.456 8.143,21.496 8.159,21.534 8.177,21.572 8.197,21.609 8.219,21.645 8.243,21.679 8.268,21.712 8.295,21.744 8.324,21.775 8.355,21.804 8.387,21.831 8.42,21.856 8.454,21.88 8.49,21.902 8.527,21.922 8.565,21.94 8.603,21.956 8.643,21.97 8.683,21.982 8.724,21.992 8.765,21.999 8.806,22.005 8.848,22.008 8.89,22.009 11.29,22.009
  Top Layer region: 11.29,7.709 8.89,7.709 8.848,7.71 8.806,7.713 8.765,7.719 8.724,7.726 8.683,7.736 8.643,7.748 8.603,7.762 8.565,7.778 8.527,7.796 8.49,7.816 8.454,7.838 8.42,7.862 8.387,7.887 8.355,7.914 8.324,7.943 8.295,7.974 8.268,8.006 8.243,8.039 8.219,8.073 8.197,8.109 8.177,8.146 8.159,8.184 8.143,8.222 8.129,8.262 8.117,8.302 8.107,8.343 8.1,8.384 8.094,8.425 8.091,8.467 8.09,8.509 8.091,8.551 8.094,8.593 8.1,8.634 8.107,8.675 8.117,8.716 8.129,8.756 8.143,8.796 8.159,8.834 8.177,8.872 8.197,8.909 8.219,8.945 8.243,8.979 8.268,9.012 8.295,9.044 8.324,9.075 8.355,9.104 8.387,9.131 8.42,9.156 8.454,9.18 8.49,9.202 8.527,9.222 8.565,9.24 8.603,9.256 8.643,9.27 8.683,9.282 8.724,9.292 8.765,9.299 8.806,9.305 8.848,9.308 8.89,9.309 11.29,9.309
  Top Layer region: 11.29,5.169 8.89,5.169 8.848,5.17 8.806,5.173 8.765,5.179 8.724,5.186 8.683,5.196 8.643,5.208 8.603,5.222 8.565,5.238 8.527,5.256 8.49,5.276 8.454,5.298 8.42,5.322 8.387,5.347 8.355,5.374 8.324,5.403 8.295,5.434 8.268,5.466 8.243,5.499 8.219,5.533 8.197,5.569 8.177,5.606 8.159,5.644 8.143,5.682 8.129,5.722 8.117,5.762 8.107,5.803 8.1,5.844 8.094,5.885 8.091,5.927 8.09,5.969 8.091,6.011 8.094,6.053 8.1,6.094 8.107,6.135 8.117,6.176 8.129,6.216 8.143,6.256 8.159,6.294 8.177,6.332 8.197,6.369 8.219,6.405 8.243,6.439 8.268,6.472 8.295,6.504 8.324,6.535 8.355,6.564 8.387,6.591 8.42,6.616 8.454,6.64 8.49,6.662 8.527,6.682 8.565,6.7 8.603,6.716 8.643,6.73 8.683,6.742 8.724,6.752 8.765,6.759 8.806,6.765 8.848,6.768 8.89,6.769 11.29,6.769
  Top Layer region: 11.29,2.629 8.28,2.629 8.269,2.63 8.259,2.631 8.248,2.633 8.238,2.636 8.228,2.639 8.218,2.642 8.209,2.646 8.199,2.651 8.19,2.656 8.181,2.661 8.172,2.667 8.164,2.674 8.156,2.68 8.149,2.688 8.141,2.695 8.135,2.703 8.128,2.711 8.122,2.72 8.117,2.729 8.112,2.738 8.107,2.748 8.103,2.757 8.1,2.767 8.097,2.777 8.094,2.787 8.092,2.798 8.091,2.808 8.09,2.819 8.09,2.829 8.09,4.029 8.09,4.039 8.091,4.05 8.092,4.06 8.094,4.071 8.097,4.081 8.1,4.091 8.103,4.101 8.107,4.11 8.112,4.12 8.117,4.129 8.122,4.138 8.128,4.147 8.135,4.155 8.141,4.163 8.149,4.17 8.156,4.178 8.164,4.184 8.172,4.191 8.181,4.197 8.19,4.202 8.199,4.207 8.209,4.212 8.218,4.216 8.228,4.219 8.238,4.222 8.248,4.225 8.259,4.227 8.269,4.228 8.28,4.229 11.29,4.229
  Top Layer region: 11.29,33.109 8.89,33.109 8.848,33.11 8.806,33.113 8.765,33.119 8.724,33.126 8.683,33.136 8.643,33.148 8.603,33.162 8.565,33.178 8.527,33.196 8.49,33.216 8.454,33.238 8.42,33.262 8.387,33.287 8.355,33.314 8.324,33.343 8.295,33.374 8.268,33.406 8.243,33.439 8.219,33.473 8.197,33.509 8.177,33.546 8.159,33.584 8.143,33.622 8.129,33.662 8.117,33.702 8.107,33.743 8.1,33.784 8.094,33.825 8.091,33.867 8.09,33.909 8.091,33.951 8.094,33.993 8.1,34.034 8.107,34.075 8.117,34.116 8.129,34.156 8.143,34.196 8.159,34.234 8.177,34.272 8.197,34.309 8.219,34.345 8.243,34.379 8.268,34.412 8.295,34.444 8.324,34.475 8.355,34.504 8.387,34.531 8.42,34.556 8.454,34.58 8.49,34.602 8.527,34.622 8.565,34.64 8.603,34.656 8.643,34.67 8.683,34.682 8.724,34.692 8.765,34.699 8.806,34.705 8.848,34.708 8.89,34.709 11.29,34.709
  Top Layer region: 11.29,25.489 8.89,25.489 8.848,25.49 8.806,25.493 8.765,25.499 8.724,25.506 8.683,25.516 8.643,25.528 8.603,25.542 8.565,25.558 8.527,25.576 8.49,25.596 8.454,25.618 8.42,25.642 8.387,25.667 8.355,25.694 8.324,25.723 8.295,25.754 8.268,25.786 8.243,25.819 8.219,25.853 8.197,25.889 8.177,25.926 8.159,25.964 8.143,26.002 8.129,26.042 8.117,26.082 8.107,26.123 8.1,26.164 8.094,26.205 8.091,26.247 8.09,26.289 8.091,26.331 8.094,26.373 8.1,26.414 8.107,26.455 8.117,26.496 8.129,26.536 8.143,26.576 8.159,26.614 8.177,26.652 8.197,26.689 8.219,26.725 8.243,26.759 8.268,26.792 8.295,26.824 8.324,26.855 8.355,26.884 8.387,26.911 8.42,26.936 8.454,26.96 8.49,26.982 8.527,27.002 8.565,27.02 8.603,27.036 8.643,27.05 8.683,27.062 8.724,27.072 8.765,27.079 8.806,27.085 8.848,27.088 8.89,27.089 11.29,27.089
  Top Layer region: 11.29,22.949 8.89,22.949 8.848,22.95 8.806,22.953 8.765,22.959 8.724,22.966 8.683,22.976 8.643,22.988 8.603,23.002 8.565,23.018 8.527,23.036 8.49,23.056 8.454,23.078 8.42,23.102 8.387,23.127 8.355,23.154 8.324,23.183 8.295,23.214 8.268,23.246 8.243,23.279 8.219,23.313 8.197,23.349 8.177,23.386 8.159,23.424 8.143,23.462 8.129,23.502 8.117,23.542 8.107,23.583 8.1,23.624 8.094,23.665 8.091,23.707 8.09,23.749 8.091,23.791 8.094,23.833 8.1,23.874 8.107,23.915 8.117,23.956 8.129,23.996 8.143,24.036 8.159,24.074 8.177,24.112 8.197,24.149 8.219,24.185 8.243,24.219 8.268,24.252 8.295,24.284 8.324,24.315 8.355,24.344 8.387,24.371 8.42,24.396 8.454,24.42 8.49,24.442 8.527,24.462 8.565,24.48 8.603,24.496 8.643,24.51 8.683,24.522 8.724,24.532 8.765,24.539 8.806,24.545 8.848,24.548 8.89,24.549 11.29,24.549
  Top Layer region: 11.29,17.869 8.89,17.869 8.848,17.87 8.806,17.873 8.765,17.879 8.724,17.886 8.683,17.896 8.643,17.908 8.603,17.922 8.565,17.938 8.527,17.956 8.49,17.976 8.454,17.998 8.42,18.022 8.387,18.047 8.355,18.074 8.324,18.103 8.295,18.134 8.268,18.166 8.243,18.199 8.219,18.233 8.197,18.269 8.177,18.306 8.159,18.344 8.143,18.382 8.129,18.422 8.117,18.462 8.107,18.503 8.1,18.544 8.094,18.585 8.091,18.627 8.09,18.669 8.091,18.711 8.094,18.753 8.1,18.794 8.107,18.835 8.117,18.876 8.129,18.916 8.143,18.956 8.159,18.994 8.177,19.032 8.197,19.069 8.219,19.105 8.243,19.139 8.268,19.172 8.295,19.204 8.324,19.235 8.355,19.264 8.387,19.291 8.42,19.316 8.454,19.34 8.49,19.362 8.527,19.382 8.565,19.4 8.603,19.416 8.643,19.43 8.683,19.442 8.724,19.452 8.765,19.459 8.806,19.465 8.848,19.468 8.89,19.469 11.29,19.469
  Top Layer region: 11.29,12.789 8.89,12.789 8.848,12.79 8.806,12.793 8.765,12.799 8.724,12.806 8.683,12.816 8.643,12.828 8.603,12.842 8.565,12.858 8.527,12.876 8.49,12.896 8.454,12.918 8.42,12.942 8.387,12.967 8.355,12.994 8.324,13.023 8.295,13.054 8.268,13.086 8.243,13.119 8.219,13.153 8.197,13.189 8.177,13.226 8.159,13.264 8.143,13.302 8.129,13.342 8.117,13.382 8.107,13.423 8.1,13.464 8.094,13.505 8.091,13.547 8.09,13.589 8.091,13.631 8.094,13.673 8.1,13.714 8.107,13.755 8.117,13.796 8.129,13.836 8.143,13.876 8.159,13.914 8.177,13.952 8.197,13.989 8.219,14.025 8.243,14.059 8.268,14.092 8.295,14.124 8.324,14.155 8.355,14.184 8.387,14.211 8.42,14.236 8.454,14.26 8.49,14.282 8.527,14.302 8.565,14.32 8.603,14.336 8.643,14.35 8.683,14.362 8.724,14.372 8.765,14.379 8.806,14.385 8.848,14.388 8.89,14.389 11.29,14.389
  Top Layer region: 11.29,10.249 8.89,10.249 8.848,10.25 8.806,10.253 8.765,10.259 8.724,10.266 8.683,10.276 8.643,10.288 8.603,10.302 8.565,10.318 8.527,10.336 8.49,10.356 8.454,10.378 8.42,10.402 8.387,10.427 8.355,10.454 8.324,10.483 8.295,10.514 8.268,10.546 8.243,10.579 8.219,10.613 8.197,10.649 8.177,10.686 8.159,10.724 8.143,10.762 8.129,10.802 8.117,10.842 8.107,10.883 8.1,10.924 8.094,10.965 8.091,11.007 8.09,11.049 8.091,11.091 8.094,11.133 8.1,11.174 8.107,11.215 8.117,11.256 8.129,11.296 8.143,11.336 8.159,11.374 8.177,11.412 8.197,11.449 8.219,11.485 8.243,11.519 8.268,11.552 8.295,11.584 8.324,11.615 8.355,11.644 8.387,11.671 8.42,11.696 8.454,11.72 8.49,11.742 8.527,11.762 8.565,11.78 8.603,11.796 8.643,11.81 8.683,11.822 8.724,11.832 8.765,11.839 8.806,11.845 8.848,11.848 8.89,11.849 11.29,11.849
  Top Layer region: 11.29,0.089 8.89,0.089 8.848,0.09 8.806,0.093 8.765,0.099 8.724,0.106 8.683,0.116 8.643,0.128 8.603,0.142 8.565,0.158 8.527,0.176 8.49,0.196 8.454,0.218 8.42,0.242 8.387,0.267 8.355,0.294 8.324,0.323 8.295,0.354 8.268,0.386 8.243,0.419 8.219,0.453 8.197,0.489 8.177,0.526 8.159,0.564 8.143,0.602 8.129,0.642 8.117,0.682 8.107,0.723 8.1,0.764 8.094,0.805 8.091,0.847 8.09,0.889 8.091,0.931 8.094,0.973 8.1,1.014 8.107,1.055 8.117,1.096 8.129,1.136 8.143,1.176 8.159,1.214 8.177,1.252 8.197,1.289 8.219,1.325 8.243,1.359 8.268,1.392 8.295,1.424 8.324,1.455 8.355,1.484 8.387,1.511 8.42,1.536 8.454,1.56 8.49,1.582 8.527,1.602 8.565,1.62 8.603,1.636 8.643,1.65 8.683,1.662 8.724,1.672 8.765,1.679 8.806,1.685 8.848,1.688 8.89,1.689 11.29,1.689
  Top Layer region: 11.29,-2.451 8.89,-2.451 8.848,-2.45 8.806,-2.447 8.765,-2.441 8.724,-2.434 8.683,-2.424 8.643,-2.412 8.603,-2.398 8.565,-2.382 8.527,-2.364 8.49,-2.344 8.454,-2.322 8.42,-2.298 8.387,-2.273 8.355,-2.246 8.324,-2.217 8.295,-2.186 8.268,-2.154 8.243,-2.121 8.219,-2.087 8.197,-2.051 8.177,-2.014 8.159,-1.976 8.143,-1.938 8.129,-1.898 8.117,-1.858 8.107,-1.817 8.1,-1.776 8.094,-1.735 8.091,-1.693 8.09,-1.651 8.091,-1.609 8.094,-1.567 8.1,-1.526 8.107,-1.485 8.117,-1.444 8.129,-1.404 8.143,-1.364 8.159,-1.326 8.177,-1.288 8.197,-1.251 8.219,-1.215 8.243,-1.181 8.268,-1.148 8.295,-1.116 8.324,-1.085 8.355,-1.056 8.387,-1.029 8.42,-1.004 8.454,-0.98 8.49,-0.958 8.527,-0.938 8.565,-0.92 8.603,-0.904 8.643,-0.89 8.683,-0.878 8.724,-0.868 8.765,-0.861 8.806,-0.855 8.848,-0.852 8.89,-0.851 11.29,-0.851
  Top Layer region: 11.29,-4.991 8.89,-4.991 8.848,-4.99 8.806,-4.987 8.765,-4.981 8.724,-4.974 8.683,-4.964 8.643,-4.952 8.603,-4.938 8.565,-4.922 8.527,-4.904 8.49,-4.884 8.454,-4.862 8.42,-4.838 8.387,-4.813 8.355,-4.786 8.324,-4.757 8.295,-4.726 8.268,-4.694 8.243,-4.661 8.219,-4.627 8.197,-4.591 8.177,-4.554 8.159,-4.516 8.143,-4.478 8.129,-4.438 8.117,-4.398 8.107,-4.357 8.1,-4.316 8.094,-4.275 8.091,-4.233 8.09,-4.191 8.091,-4.149 8.094,-4.107 8.1,-4.066 8.107,-4.025 8.117,-3.984 8.129,-3.944 8.143,-3.904 8.159,-3.866 8.177,-3.828 8.197,-3.791 8.219,-3.755 8.243,-3.721 8.268,-3.688 8.295,-3.656 8.324,-3.625 8.355,-3.596 8.387,-3.569 8.42,-3.544 8.454,-3.52 8.49,-3.498 8.527,-3.478 8.565,-3.46 8.603,-3.444 8.643,-3.43 8.683,-3.418 8.724,-3.408 8.765,-3.401 8.806,-3.395 8.848,-3.392 8.89,-3.391 11.29,-3.391
  Top Layer region: 11.29,-7.531 8.89,-7.531 8.848,-7.53 8.806,-7.527 8.765,-7.521 8.724,-7.514 8.683,-7.504 8.643,-7.492 8.603,-7.478 8.565,-7.462 8.527,-7.444 8.49,-7.424 8.454,-7.402 8.42,-7.378 8.387,-7.353 8.355,-7.326 8.324,-7.297 8.295,-7.266 8.268,-7.234 8.243,-7.201 8.219,-7.167 8.197,-7.131 8.177,-7.094 8.159,-7.056 8.143,-7.018 8.129,-6.978 8.117,-6.938 8.107,-6.897 8.1,-6.856 8.094,-6.815 8.091,-6.773 8.09,-6.731 8.091,-6.689 8.094,-6.647 8.1,-6.606 8.107,-6.565 8.117,-6.524 8.129,-6.484 8.143,-6.444 8.159,-6.406 8.177,-6.368 8.197,-6.331 8.219,-6.295 8.243,-6.261 8.268,-6.228 8.295,-6.196 8.324,-6.165 8.355,-6.136 8.387,-6.109 8.42,-6.084 8.454,-6.06 8.49,-6.038 8.527,-6.018 8.565,-6 8.603,-5.984 8.643,-5.97 8.683,-5.958 8.724,-5.948 8.765,-5.941 8.806,-5.935 8.848,-5.932 8.89,-5.931 11.29,-5.931
  Top Layer region: 11.29,-12.611 8.89,-12.611 8.848,-12.61 8.806,-12.607 8.765,-12.601 8.724,-12.594 8.683,-12.584 8.643,-12.572 8.603,-12.558 8.565,-12.542 8.527,-12.524 8.49,-12.504 8.454,-12.482 8.42,-12.458 8.387,-12.433 8.355,-12.406 8.324,-12.377 8.295,-12.346 8.268,-12.314 8.243,-12.281 8.219,-12.247 8.197,-12.211 8.177,-12.174 8.159,-12.136 8.143,-12.098 8.129,-12.058 8.117,-12.018 8.107,-11.977 8.1,-11.936 8.094,-11.895 8.091,-11.853 8.09,-11.811 8.091,-11.769 8.094,-11.727 8.1,-11.686 8.107,-11.645 8.117,-11.604 8.129,-11.564 8.143,-11.524 8.159,-11.486 8.177,-11.448 8.197,-11.411 8.219,-11.375 8.243,-11.341 8.268,-11.308 8.295,-11.276 8.324,-11.245 8.355,-11.216 8.387,-11.189 8.42,-11.164 8.454,-11.14 8.49,-11.118 8.527,-11.098 8.565,-11.08 8.603,-11.064 8.643,-11.05 8.683,-11.038 8.724,-11.028 8.765,-11.021 8.806,-11.015 8.848,-11.012 8.89,-11.011 11.29,-11.011
  Top Layer region: 11.29,-15.151 8.89,-15.151 8.848,-15.15 8.806,-15.147 8.765,-15.141 8.724,-15.134 8.683,-15.124 8.643,-15.112 8.603,-15.098 8.565,-15.082 8.527,-15.064 8.49,-15.044 8.454,-15.022 8.42,-14.998 8.387,-14.973 8.355,-14.946 8.324,-14.917 8.295,-14.886 8.268,-14.854 8.243,-14.821 8.219,-14.787 8.197,-14.751 8.177,-14.714 8.159,-14.676 8.143,-14.638 8.129,-14.598 8.117,-14.558 8.107,-14.517 8.1,-14.476 8.094,-14.435 8.091,-14.393 8.09,-14.351 8.091,-14.309 8.094,-14.267 8.1,-14.226 8.107,-14.185 8.117,-14.144 8.129,-14.104 8.143,-14.064 8.159,-14.026 8.177,-13.988 8.197,-13.951 8.219,-13.915 8.243,-13.881 8.268,-13.848 8.295,-13.816 8.324,-13.785 8.355,-13.756 8.387,-13.729 8.42,-13.704 8.454,-13.68 8.49,-13.658 8.527,-13.638 8.565,-13.62 8.603,-13.604 8.643,-13.59 8.683,-13.578 8.724,-13.568 8.765,-13.561 8.806,-13.555 8.848,-13.552 8.89,-13.551 11.29,-13.551
  Top Layer region: 11.29,15.329 8.28,15.329 8.269,15.33 8.259,15.331 8.248,15.333 8.238,15.336 8.228,15.339 8.218,15.342 8.209,15.346 8.199,15.351 8.19,15.356 8.181,15.361 8.172,15.367 8.164,15.374 8.156,15.38 8.149,15.388 8.141,15.395 8.135,15.403 8.128,15.411 8.122,15.42 8.117,15.429 8.112,15.438 8.107,15.448 8.103,15.457 8.1,15.467 8.097,15.477 8.094,15.487 8.092,15.498 8.091,15.508 8.09,15.519 8.09,15.529 8.09,16.729 8.09,16.739 8.091,16.75 8.092,16.76 8.094,16.771 8.097,16.781 8.1,16.791 8.103,16.801 8.107,16.81 8.112,16.82 8.117,16.829 8.122,16.838 8.128,16.847 8.135,16.855 8.141,16.863 8.149,16.87 8.156,16.878 8.164,16.884 8.172,16.891 8.181,16.897 8.19,16.902 8.199,16.907 8.209,16.912 8.218,16.916 8.228,16.919 8.238,16.922 8.248,16.925 8.259,16.927 8.269,16.928 8.28,16.929 11.29,16.929
  Top Layer region: 11.29,-10.071 8.28,-10.071 8.269,-10.07 8.259,-10.069 8.248,-10.067 8.238,-10.064 8.228,-10.061 8.218,-10.058 8.209,-10.054 8.199,-10.049 8.19,-10.044 8.181,-10.039 8.172,-10.033 8.164,-10.026 8.156,-10.02 8.149,-10.012 8.141,-10.005 8.135,-9.997 8.128,-9.989 8.122,-9.98 8.117,-9.971 8.112,-9.962 8.107,-9.952 8.103,-9.943 8.1,-9.933 8.097,-9.923 8.094,-9.913 8.092,-9.902 8.091,-9.892 8.09,-9.881 8.09,-9.871 8.09,-8.671 8.09,-8.661 8.091,-8.65 8.092,-8.64 8.094,-8.629 8.097,-8.619 8.1,-8.609 8.103,-8.599 8.107,-8.59 8.112,-8.58 8.117,-8.571 8.122,-8.562 8.128,-8.553 8.135,-8.545 8.141,-8.537 8.149,-8.53 8.156,-8.522 8.164,-8.516 8.172,-8.509 8.181,-8.503 8.19,-8.498 8.199,-8.493 8.209,-8.488 8.218,-8.484 8.228,-8.481 8.238,-8.478 8.248,-8.475 8.259,-8.473 8.269,-8.472 8.28,-8.471 11.29,-8.471
  Top Layer region: -2.498,-13.322 -2.456,-13.325 -2.415,-13.331 -2.374,-13.338 -2.333,-13.348 -2.293,-13.36 -2.253,-13.374 -2.215,-13.39 -2.177,-13.408 -2.14,-13.428 -2.104,-13.45 -2.07,-13.474 -2.037,-13.499 -2.005,-13.526 -1.974,-13.555 -1.945,-13.586 -1.918,-13.618 -1.893,-13.651 -1.869,-13.685 -1.847,-13.721 -1.827,-13.758 -1.809,-13.796 -1.793,-13.834 -1.779,-13.874 -1.767,-13.914 -1.757,-13.955 -1.75,-13.996 -1.744,-14.037 -1.741,-14.079 -1.74,-14.121 -1.74,-16.521 -3.34,-16.521 -3.34,-14.121 -3.339,-14.079 -3.336,-14.037 -3.33,-13.996 -3.323,-13.955 -3.313,-13.914 -3.301,-13.874 -3.287,-13.834 -3.271,-13.796 -3.253,-13.758 -3.233,-13.721 -3.211,-13.685 -3.187,-13.651 -3.162,-13.618 -3.135,-13.586 -3.106,-13.555 -3.075,-13.526 -3.043,-13.499 -3.01,-13.474 -2.976,-13.45 -2.94,-13.428 -2.903,-13.408 -2.865,-13.39 -2.827,-13.374 -2.787,-13.36 -2.747,-13.348 -2.706,-13.338 -2.665,-13.331 -2.624,-13.325 -2.582,-13.322 -2.54,-13.321
  Top Layer region: 0.621,-13.322 0.631,-13.323 0.642,-13.325 0.652,-13.328 0.662,-13.331 0.672,-13.334 0.681,-13.338 0.691,-13.343 0.7,-13.348 0.709,-13.353 0.718,-13.359 0.726,-13.366 0.734,-13.372 0.741,-13.38 0.749,-13.387 0.755,-13.395 0.762,-13.403 0.768,-13.412 0.773,-13.421 0.778,-13.43 0.783,-13.44 0.787,-13.449 0.79,-13.459 0.793,-13.469 0.796,-13.479 0.798,-13.49 0.799,-13.5 0.8,-13.511 0.8,-13.521 0.8,-16.521 -0.8,-16.521 -0.8,-13.521 -0.8,-13.511 -0.799,-13.5 -0.798,-13.49 -0.796,-13.479 -0.793,-13.469 -0.79,-13.459 -0.787,-13.449 -0.783,-13.44 -0.778,-13.43 -0.773,-13.421 -0.768,-13.412 -0.762,-13.403 -0.755,-13.395 -0.749,-13.387 -0.741,-13.38 -0.734,-13.372 -0.726,-13.366 -0.718,-13.359 -0.709,-13.353 -0.7,-13.348 -0.691,-13.343 -0.681,-13.338 -0.672,-13.334 -0.662,-13.331 -0.652,-13.328 -0.642,-13.325 -0.631,-13.323 -0.621,-13.322 -0.61,-13.321 0.61,-13.321
  Top Layer region: 2.582,-13.322 2.624,-13.325 2.665,-13.331 2.706,-13.338 2.747,-13.348 2.787,-13.36 2.827,-13.374 2.865,-13.39 2.903,-13.408 2.94,-13.428 2.976,-13.45 3.01,-13.474 3.043,-13.499 3.075,-13.526 3.106,-13.555 3.135,-13.586 3.162,-13.618 3.187,-13.651 3.211,-13.685 3.233,-13.721 3.253,-13.758 3.271,-13.796 3.287,-13.834 3.301,-13.874 3.313,-13.914 3.323,-13.955 3.33,-13.996 3.336,-14.037 3.339,-14.079 3.34,-14.121 3.34,-16.521 1.74,-16.521 1.74,-14.121 1.741,-14.079 1.744,-14.037 1.75,-13.996 1.757,-13.955 1.767,-13.914 1.779,-13.874 1.793,-13.834 1.809,-13.796 1.827,-13.758 1.847,-13.721 1.869,-13.685 1.893,-13.651 1.918,-13.618 1.945,-13.586 1.974,-13.555 2.005,-13.526 2.037,-13.499 2.07,-13.474 2.104,-13.45 2.14,-13.428 2.177,-13.408 2.215,-13.39 2.253,-13.374 2.293,-13.36 2.333,-13.348 2.374,-13.338 2.415,-13.331 2.456,-13.325 2.498,-13.322 2.54,-13.321
  Top Layer region: -8.848,34.708 -8.806,34.705 -8.765,34.699 -8.724,34.692 -8.683,34.682 -8.643,34.67 -8.603,34.656 -8.565,34.64 -8.527,34.622 -8.49,34.602 -8.454,34.58 -8.42,34.556 -8.387,34.531 -8.355,34.504 -8.324,34.475 -8.295,34.444 -8.268,34.412 -8.243,34.379 -8.219,34.345 -8.197,34.309 -8.177,34.272 -8.159,34.234 -8.143,34.196 -8.129,34.156 -8.117,34.116 -8.107,34.075 -8.1,34.034 -8.094,33.993 -8.091,33.951 -8.09,33.909 -8.091,33.867 -8.094,33.825 -8.1,33.784 -8.107,33.743 -8.117,33.702 -8.129,33.662 -8.143,33.622 -8.159,33.584 -8.177,33.546 -8.197,33.509 -8.219,33.473 -8.243,33.439 -8.268,33.406 -8.295,33.374 -8.324,33.343 -8.355,33.314 -8.387,33.287 -8.42,33.262 -8.454,33.238 -8.49,33.216 -8.527,33.196 -8.565,33.178 -8.603,33.162 -8.643,33.148 -8.683,33.136 -8.724,33.126 -8.765,33.119 -8.806,33.113 -8.848,33.11 -8.89,33.109 -11.29,33.109 -11.29,34.709 -8.89,34.709
  silkscreen extent -12.29,-15.72 10.5,36.58, body extent -10.5,-15.72 10.5,36.58, height 3.73
"Poti 3296-Footprint-1" [mm]
  rect 1.248x1.248 hole 0.74: 1(-2.54,0)
  round 1.248 hole 0.74: 2(0,0) 3(2.54,0)
  silkscreen extent -5.39,-2.41 4.76,2.42, body extent -4.76,-2.41 4.76,2.42, height 11.55
Resistor [mm]
  round 1.2 hole 0.8: 1(-5.627,0) 2(5.373,0)
  silkscreen extent -4.71,-1.3 4.45,1.3, body extent -5.9,-1.3 5.65,1.3, height 2.6
Resistor-Footprint-1 [mm]
  round 1.2 hole 0.8: 1(0,0) 2(11,0)
  silkscreen extent 0.92,-1.3 10.08,1.3, body extent -0.28,-1.3 11.27,1.3, height 2.6
Si7021-Footprint-1 [mm]
  round 1.62 hole 1.27: 3V3(-2.55,-0.006) GND(-0.01,-0.006) SCL(2.53,-0.006) SDA(5.07,-0.006)
  rect 1.62x1.62 hole 1.27: VIN(-5.09,-0.006)
  silkscreen extent -6.6,-1.91 6.98,8.51
"SMD LED-Footprint-1" [mm]
  rect 1.6x2.4 smd: A(-1.425,-0.127) K(1.425,-0.127)
  silkscreen extent -3.3,-1.64 1.75,1.39, body extent -1.75,-1.53 1.75,1.27, height 1.9
"SMD Resistor-Footprint-1" [mm]
  rect 0.97x1.38 smd: 1(-0.895,-0.021) 2(0.965,-0.021)
  silkscreen extent -0.08,-0.7 0.16,0.66, body extent -0.95,-0.65 1.05,0.6, height 0.6